# Altium PCB Dual_Holding_Dongle_1)_sided.PcbDoc
Units mil, origin at the board's own origin, x right, y up, seen from the top; angles counter-clockwise.
Board outline 826.77 x 1181.1 mil, 2 copper layers (Top Layer, Bottom Layer); 47 components, 36 nets, 193 pads, 1 vias.
Unrouted connection lines stored in the file: 92.
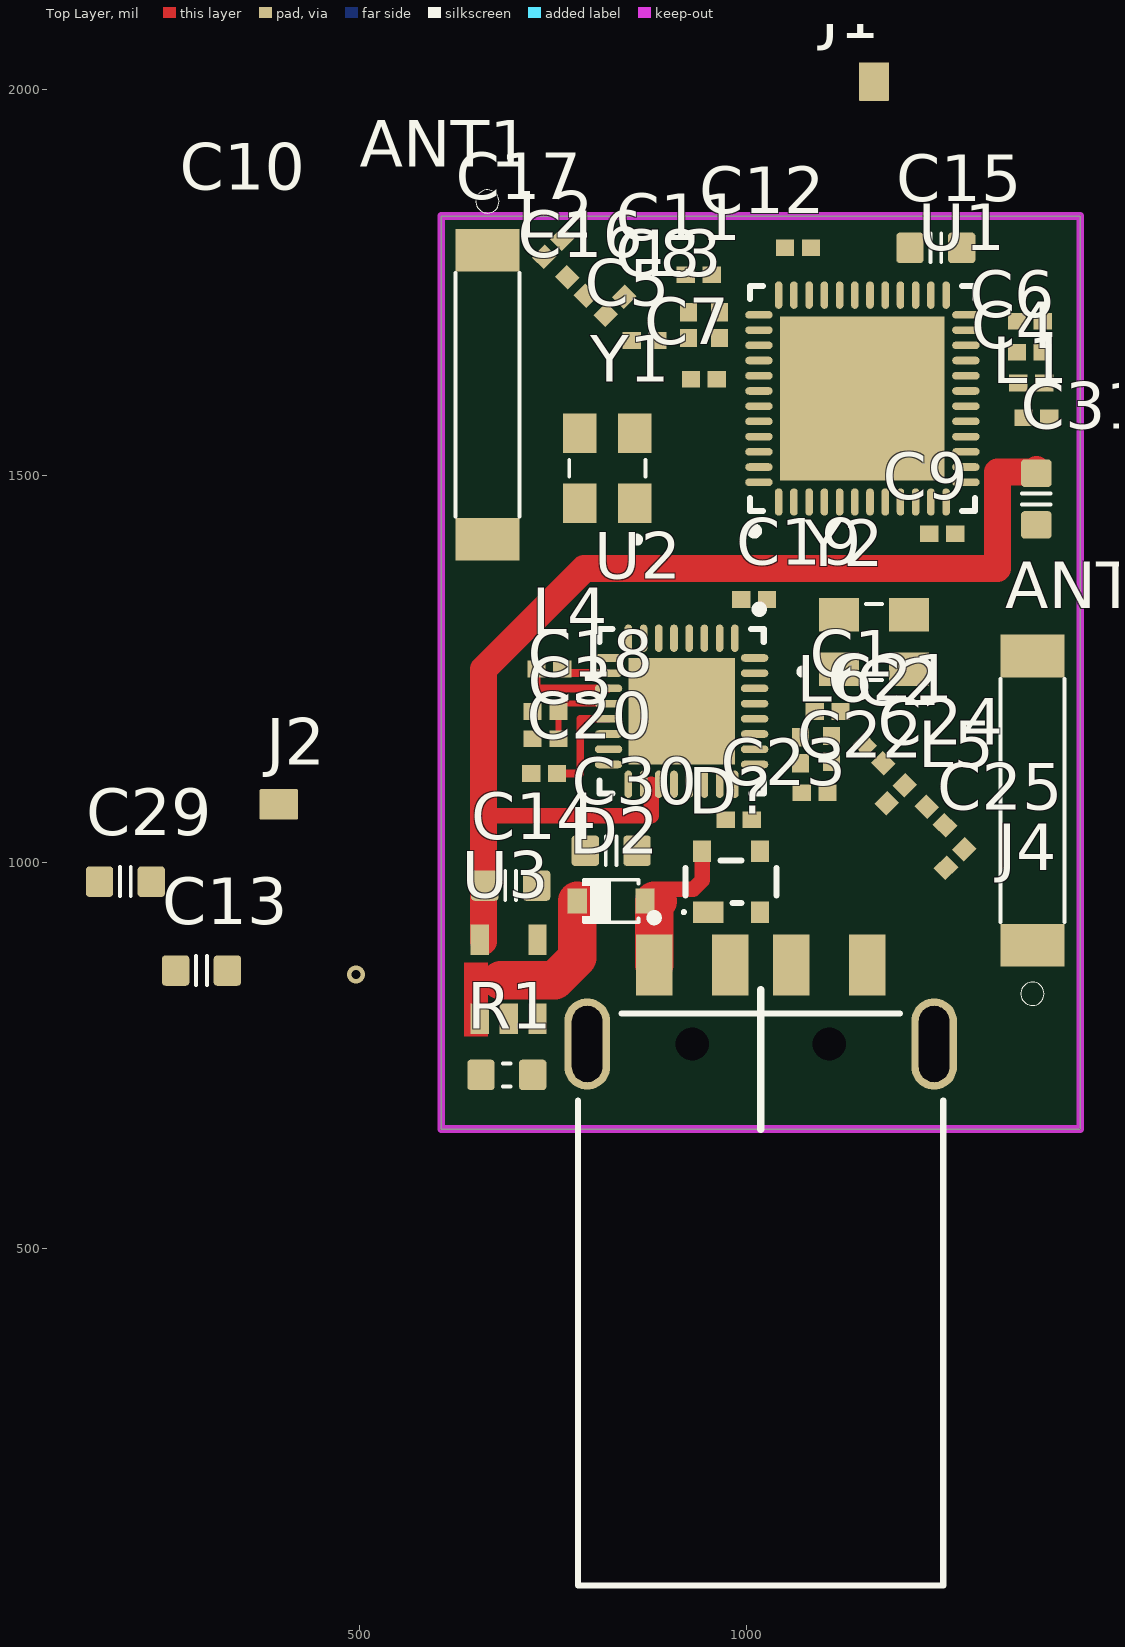
[diagram p0: Top Layer view]
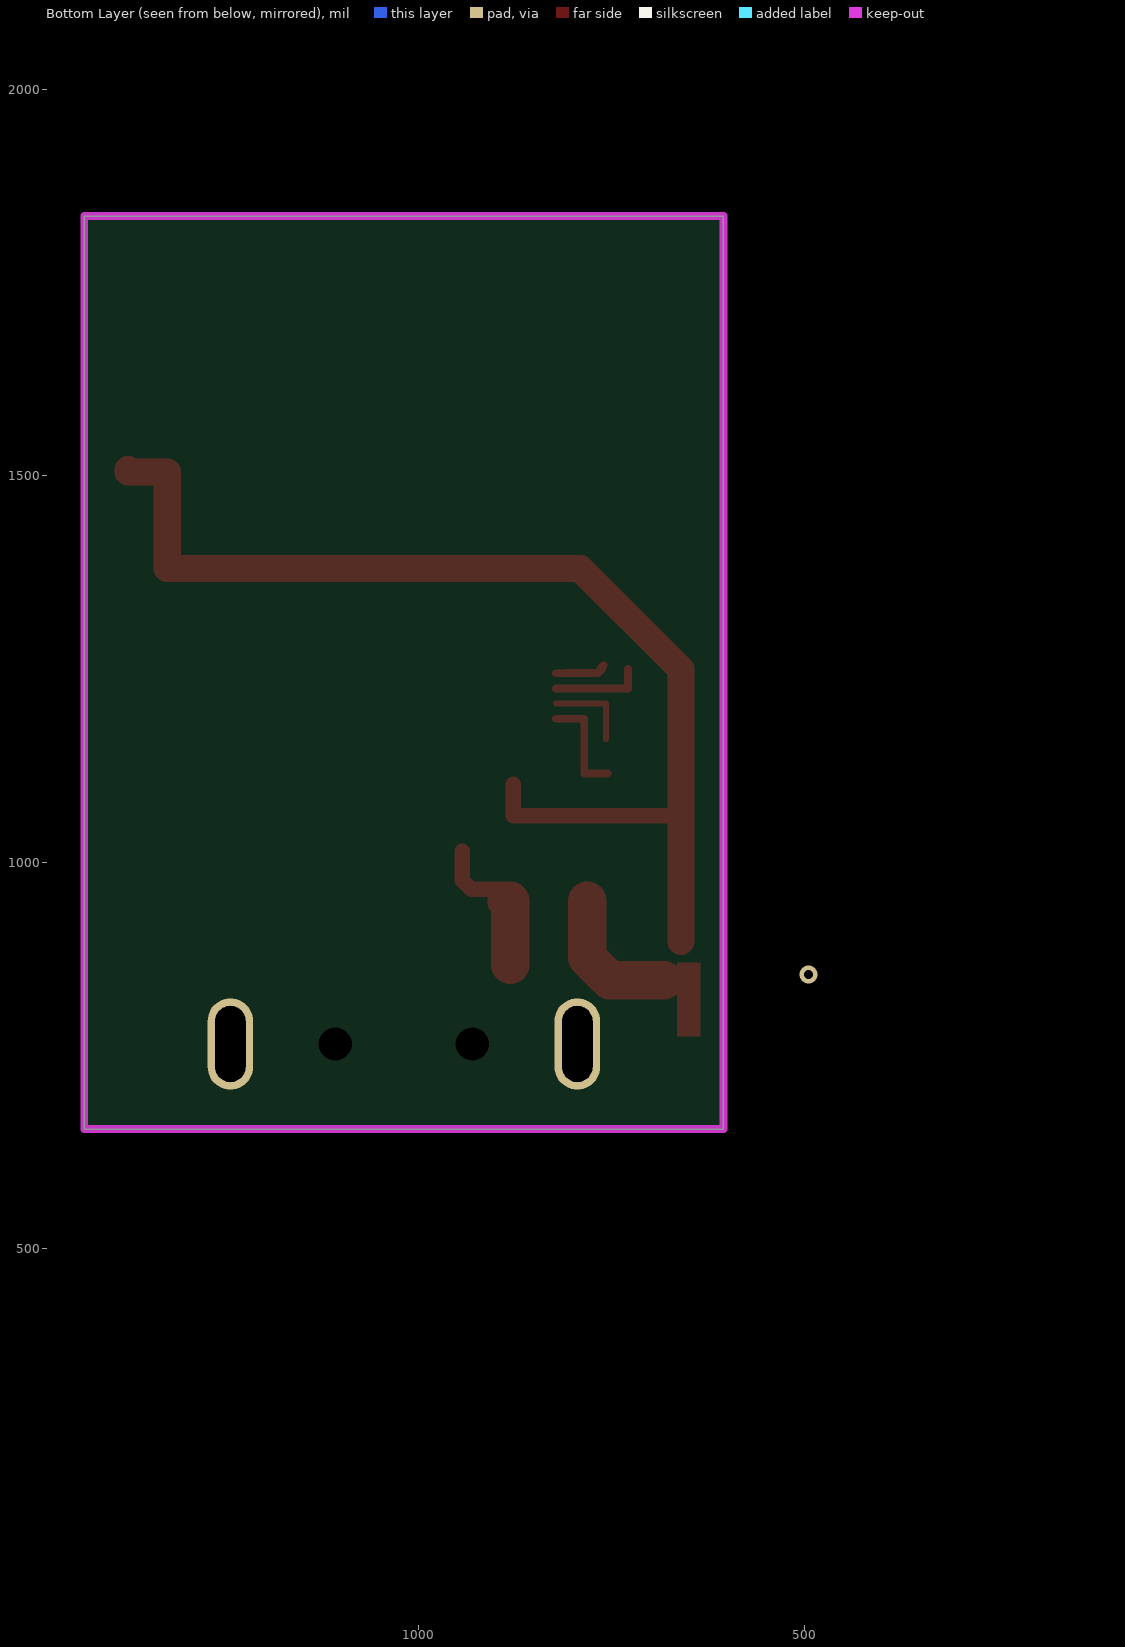
[diagram p1: Bottom Layer view, seen from below]

## Layer stack, top to bottom
Top Solder: solder mask 0.4, Solder Resist, Dk 3.5
Top Layer: signal copper 1.4
Dielectric 1: dielectric 12.6, FR-4, Dk 4.8
Bottom Layer: signal copper 1.4
Bottom Solder: solder mask 0.4, Solder Resist, Dk 3.5

## Board outline
605,655 1431.77,655 1431.77,1836.1 605,1836.1

## Design rules (kind name [scope] priority, off if disabled: settings)
Clearance [All] p1: gap=7 ignorepadtopadclearanceinfootprint=FALSE
PolygonConnect [All] p1: connectstyle=Relief reliefconductorwidth=10 reliefentries=4 polygonreliefangle="90 Angle" airgapwidth=10
RoutingVias [All] p1: holewidth=28 width=50 viastyle="Through Hole" minholewidth=0 minwidth=1 maxholewidth=28 maxwidth=100
SolderMaskExpansion [All] p1: expansion=4 istentingtop=FALSE
Width [All] p1: maxlimit=1000 minlimit=7 preferedwidth=10 minimp=50.000000 maximp=50.000000 favimp=50.000000
30 further rules are at their usual default settings.

## Classes and differential pairs
net class RF: NetANT1_1 NetANT2_1 NetC2_1 NetC2_2 NetC5_1 NetC5_2

## Components (designator, comment, footprint, x,y, rotation, side; value= is the part's Value field where it differs from the comment)
ANT1 "ANT_Rainsun" ANT2-SMD-9.5X2.1X1.0MM 665,1605 r270 top
ANT2 "ANT_Rainsun" ANT2-SMD-9.5X2.1X1.0MM 1370,1080 r90 top
C1 "2.2uF" CAP0402 1105,1195 r0 top
C2 "220pF" CAP0402 1165,1140 r315 top
C3 "104" CAP0402 740,1160 r180 top
C4 "2.2uF" CAP0402 1368.46,1620 r0 top
C5 "220pF" CAP0402 868.27,1675 r180 top
C6 "104" CAP0402 1366.73,1660 r0 top
C7 "2.2uF" CAP0402 945,1625 r180 top
C8 "2.7pF" CAP0402 925,1695 r90 top
C9 "1UF" CAP0402 1253.27,1425 r0 top
C10 "1UF" CAP0402 1366.73,1700 r0 top
C11 "18pF" CAP0402 938.27,1760 r0 top
C12 "1UF" CAP0402 1066.73,1795 r0 top
C13 "1UF" CAPC1608X90N 295,860 r0 top
C14 "1UF" CAPC1608X90N 695,970 r0 top
C15 "1UF" CAPC1608X90N 1245,1795 r0 top
C16 "2pF" CAP0402 830,1720 r45 top
C17 "2pF" CAP0402 750,1795 r45 top
C18 "2.2uF" CAP0402 740,1195 r180 top
C19 "1UF" CAP0402 1010,1340 r0 top
C20 "1UF" CAP0402 738.27,1115 r180 top
C21 "2.7pF" CAP0402 1110,1146.73 r270 top
C22 "18pF" CAP0402 1088.27,1090 r180 top
C23 "1UF" CAP0402 990,1055 r180 top
C24 "2pF" CAP0402 1193.17,1088.17 r225 top
C25 "2pF" CAP0402 1270,1005 r225 top
C29 "10uF" CAPC1608X90N 196.54,975 r0 top
C30 "10uF" CAPC1608X90N 825,1015 r0 top
C31 "10uF" CAPC1608X90N 1375,1470 r270 top
D2 "1N5819/SS14/S4(SOD_323)" SMT_DIODE_SOD_323 825,950 r180 top
D? "PRTR5V0U2X,215" NXP-SOT143B-4_V 980,975 r90 top
J1 "TEST_POINT" TEST_POINT 1165,2010 r0 top
J2 "TEST_POINT" TEST_POINT 395,1075 r90 top
J4 "480-37-1000" MOLX-480-37-1000_V 1018.39,816.18 r0 top locked
L1 "47uH" IND0402 1375,1575 r0 top value="150 mH"
L2 "3.3nH" IND0402 780,1745 r135 top value="150 mH"
L3 "1.3nF" IND0402 965,1695 r270 top value="150 mH"
L4 "47uH" IND0402 745,1250 r180 top value="150 mH"
L5 "3.3nH" IND0402 1245,1060 r135 top value="150 mH"
L6 "1.3nF" IND0402 1070,1145 r90 top value="150 mH"
R1 "Resistor" RESC1608N_ZERO 690,725 r0 top value=100K
U1 "Telink TLSR8251F512ET48" QFN50P700X700X80_HS-49N 1150,1600 r90 top
U2 "Telink TLSR8251F512ET32" QFN50P500X500X80_HS-33N2 916.1,1195.51 r270 top
U3 "AP2112K-3.3TRG1" SOT23-5 692.4,797.64 r0 top
Y1 "ECS-240-10-33-AGM-TR" XTAL_ECS-240-10-33-AGM-TR 820,1510 r90 top
Y2 "ECS-240-10-33-AGM-TR" XTAL_ECS-240-10-33-AGM-TR 1165,1285 r0 top

## Footprints (in the part's own frame and the unit in brackets; to place one, negate y for a bottom-side part, rotate by r counter-clockwise, add the part's x,y. Pads: shape width x height; smd on the part's side, far side on the other; paste and mask are expansions set on the pad)
ANT2-SMD-9.5X2.1X1.0MM [mm]
  rect 1.4x2.1 smd: 1(-4.75,0) 2(4.75,0)
  silkscreen extent -6.73,-1.05 4,1.05
CAP0402 [mm] "0402 foorprint SMT"
  rect 0.6x0.55 smd: 1(-0.425,0) 2(0.425,0)
  body extent -0.5,-0.26 0.5,0.26, height 0.57
CAPC1608X90N [mm] "Chip Capacitor, Body 1.6x0.8mm, EIA 0603, IPC Medium Density"
  round 0.254 on Mech15: 0(0,0)
  rrect25% 0.9x1 smd: 1(-0.85,0) 2(0.85,0)
  silkscreen extent -0.18,-0.48 0.18,0.48, body extent -0.85,-0.45 0.85,0.45, height 0.89
IND0402 [mm] "0402 foorprint SMT"
  rect 0.6x0.55 smd: 1(-0.425,0) 2(0.425,0)
  body extent -0.5,-0.25 0.5,0.25, height 0.5
MOLX-480-37-1000_V [mm] "CONN, 4-Leads, Body 12x18.8mm"
  rect 1.2x2 smd: 1(-3.5,1.3) 2(-1,1.3) 3(1,1.3) 4(3.5,1.3)
  oval 1.5x3 hole 1 slot 2.5 at 90 deg: 5(-5.7,-1.3) 6(5.7,-1.3)
  round 0.5 hole 1.1 unplated: MH1(-2.25,-1.3) MH2(2.25,-1.3)
  silkscreen extent -6,-19.1 6,2.97, body extent -6.35,-19.08 6.35,2.2, height 3.07
NXP-SOT143B-4_V [mm] "SOT143, 4-Leads, Body 3x1.4mm"
  rect 0.7x1 smd: 1(-1,0.75)
  rect 0.7x0.6 smd: 2(-1,-0.95) 3(1,-0.95) 4(1,0.95)
  silkscreen extent -1.05,-1.5 0.7,1.6, body extent -0.7,-1.5 0.7,1.5, height 1.1
QFN50P500X500X80_HS-33N2 [mm] "QFN, 32-Leads, Body 5.00x5.00mm, Pitch 0.50mm, Thermal Pad 3.50x3.50mm, IPC Medium Density"
  oval 0.9x0.25 smd: 1(-2.4,1.75) 2(-2.4,1.25) 3(-2.4,0.75) 4(-2.4,0.25) 5(-2.4,-0.25) 6(-2.4,-0.75) 7(-2.4,-1.25) 8(-2.4,-1.75) 17(2.4,-1.75) 18(2.4,-1.25) 19(2.4,-0.75) 20(2.4,-0.25) 21(2.4,0.25) 22(2.4,0.75) 23(2.4,1.25) 24(2.4,1.75)
  oval 0.25x0.9 smd: 9(-1.75,-2.4) 10(-1.25,-2.4) 11(-0.75,-2.4) 12(-0.25,-2.4) 13(0.25,-2.4) 14(0.75,-2.4) 15(1.25,-2.4) 16(1.75,-2.4) 25(1.75,2.4) 26(1.25,2.4) 27(0.75,2.4) 28(0.25,2.4) 29(-0.25,2.4) 30(-0.75,2.4) 31(-1.25,2.4) 32(-1.75,2.4)
  rect 3.5x3.5 smd: 33(0,0)
  silkscreen extent -3.47,-2.7 2.7,2.7, body extent -2.55,-2.55 2.55,2.55, height 0.8
QFN50P700X700X80_HS-49N [mm] "QFN, 48-Leads, Body 7.00x7.00mm, Pitch 0.50mm, Thermal Pad 5.40x5.40mm, IPC Medium Density"
  oval 0.9x0.25 smd: 1(-3.4,2.75) 2(-3.4,2.25) 3(-3.4,1.75) 4(-3.4,1.25) 5(-3.4,0.75) 6(-3.4,0.25) 7(-3.4,-0.25) 8(-3.4,-0.75) 9(-3.4,-1.25) 10(-3.4,-1.75) 11(-3.4,-2.25) 12(-3.4,-2.75) 25(3.4,-2.75) 26(3.4,-2.25) 27(3.4,-1.75) 28(3.4,-1.25) 29(3.4,-0.75) 30(3.4,-0.25) 31(3.4,0.25) 32(3.4,0.75) 33(3.4,1.25) 34(3.4,1.75) 35(3.4,2.25) 36(3.4,2.75)
  oval 0.25x0.9 smd: 13(-2.75,-3.4) 14(-2.25,-3.4) 15(-1.75,-3.4) 16(-1.25,-3.4) 17(-0.75,-3.4) 18(-0.25,-3.4) 19(0.25,-3.4) 20(0.75,-3.4) 21(1.25,-3.4) 22(1.75,-3.4) 23(2.25,-3.4) 24(2.75,-3.4) 37(2.75,3.4) 38(2.25,3.4) 39(1.75,3.4) 40(1.25,3.4) 41(0.75,3.4) 42(0.25,3.4) 43(-0.25,3.4) 44(-0.75,3.4) 45(-1.25,3.4) 46(-1.75,3.4) 47(-2.25,3.4) 48(-2.75,3.4)
  rect 5.4x5.4 smd: 49(0,0)
  silkscreen extent -4.47,-3.7 3.7,3.7, body extent -3.55,-3.55 3.55,3.55, height 0.8
RESC1608N_ZERO [mm] "Chip Resistor, Body 1.6x0.8mm, 0603, IPC Medium Density"
  round 0.254 on Mech15: 0(0,0)
  rrect25% 0.9x1 smd: 1(-0.85,0) 2(0.85,0)
  silkscreen extent -0.13,-0.38 0.13,0.38, body extent -0.85,-0.45 0.85,0.45, height 0.89
SMT_DIODE_SOD_323 [mm]
  rect 0.63x0.83 smd: 1(-1.115,0) 2(1.115,0)
  silkscreen extent -0.9,-0.7 0.96,0.7, body extent -1.35,-0.62 1.35,0.62, height 1.1
SOT23-5 [mm] "SOT143-4 as used in SP0503BAHTG"
  round 0.2 on Top Overlay: 1(-1.7,0.8)
  rect 0.6x1 smd: 1(-0.95,0) 2(0,0) 3(0.95,0) 4(0.95,2.6) 5(-0.95,2.6)
  body extent -1.46,0.13 1.46,2.47, height 1
TEST_POINT [mm]
  rrect10% 1x1.27 smd mask+0.025: 1(0,0)
XTAL_ECS-240-10-33-AGM-TR [mm]
  rect 1.3x1.1 smd: 1(-1.15,-0.9) 2(1.15,-0.9) 3(1.15,0.9) 4(-1.15,0.9)
  silkscreen extent -2.45,-1.25 0.27,1.25

## Part data
ANT1 ANT2: "318010004", Package="FakePackage u", Availability="No availability data", Check_prices=https://www.snapeda.com/parts/AN9520/RainSun/view-part/106325/?ref=eda, MF=RainSun, MP=AN9520, Price=None, SnapEDA_Link=https://www.snapeda.com/parts/AN9520/RainSun/view-part/106325/?ref=snap
C1 C2 C3 C4 C5 C6 C7 C8 C9 C10 C11 C12 C13 C14 C15 C16 C17 C18 C19 C20 C21 C22 C23 C24 C25 C29 C30 C31: library part "CAP C_0603", "Capacitor SMD Cer 470nF 10% 16V X7R 0603", Manufacturer 1="Murata Electronics North America", Manufacturer 2="TDK Corporation", Manufacturer 3="Taiyo Yuden", Manufacturer 4=Samsung, Manufacturer Part Number 1=GRM188R71C474KA88D, Manufacturer Part Number 2=C1608X7R1C474K, Manufacturer Part Number 3=EMK107B7474KA-T, Manufacturer Part Number 4=CL10B474KONE, Package / Case="0603 (1608 metric)", Ratings="16V; X7R", Supplier Part Number 1=490-3295-2-ND, Tolerance=±10%, ComponentLink1Description=http://psearch.murata.com/capacitor/product/GRM188R71C474KA88#.pdf, ComponentLink1URL=http://psearch.murata.com/capacitor/product/GRM188R71C474KA88#.pdf, ComponentLink2Description=http://product.tdk.com/capacitor/mlcc/en/documents/mlcc_commercial_general_en.pdf, ComponentLink2URL=http://product.tdk.com/capacitor/mlcc/en/documents/mlcc_commercial_general_en.pdf, ComponentLink3Description=http://www.yuden.co.jp/or/product/category/capacitor/EMK107B7474KA-T.pdf, ComponentLink3URL=http://www.yuden.co.jp/or/product/category/capacitor/EMK107B7474KA-T.pdf, Material=ceramic, SCDType=spec, Supplier 1=Digi-Key, Supplier 2=Digi-Key, Supplier 3=Digi-Key, Supplier Part Number 2=445-5192-2-ND, Supplier Part Number 3=587-1250-2-ND
D2: library part SMT_DIODE_SCHOTTKY_SOD_323, "Surface mount schottky diode SOD-323(0805) Package"
D?: library part CMP-2000-05285-1, "Ultra Low Capacitance Double Rail-to-Rail ESD Protection Diode, 5.5 V, 1 pF, -40 to 85 degC, 4-Pin SOT143B, RoHS, Tape and Reel", Capacitance Value=16pF, ESD Protection Voltage=8KV@ContactDisc, Leakage Current=0.1uA, Manufacturer="NXP Semiconductors", Operating Temp Range=-40Cto85C, Operating Temperature Classification=Industrial, Operating Temperature Max Deg. C=85C, Operating Temperature Min Deg. C=-40C, Package / Case=SOT, Reverse Breakdown Voltage=6V, Reverse Stand-off Voltage=5.5V, Configuration=Quad, Datasheet URL=https://datasheet.ciiva.com/4479/prtr5v0u2x-102853-4479461.pdf, Datasheet Version="Rev. 02, 01/2008", Direction Type=Uni-Directional, Leakage Current (Max)=0.1uA, Manufacturer URL=http://www.nxp.com/, Mounting=SurfaceMount, Mounting Style=SurfaceMount, Number of Elements=1, Package Type=SOT, Packaging=TapeandReel, Pin Count=3+Tab, Polarity=Uni-Directional, Product Depth (mm)=1.4mm, Product Height (mm)=1mm, Product Length (mm)=3mm, Rad Hardened=No, Suppressor Type=DiodeArrays, Working Voltage=5.5V, Working Voltage (Max)=5.5V
J4: library part CMP-1676-00005-1, "Universal Serial Bus (USB) Shielded I/O Plug, Type A, Right Angle Connector, 1.5 A, -20 to 85 degC, 4-Pin SMD, RoHS, Tray", Case Code (Imperial)=0603, Case Code (Metric)=1608, Max Operating Temperature="155 degC", Min Operating Temperature="-55 degC", Package Quantity=5000, Power Rating="100 mW", Resistance="1 mohm", Tolerance=1%, Voltage Rating="50 V", Case\Package=0603, ComponentLink1Description="Manufacturer URL", ComponentLink1URL=http://www.molex.com/, ComponentLink2Description=Datasheet, ComponentLink2URL=http://www.molex.com/pdm_docs/sd/480371000_sd.pdf, DatasheetVersion="Rev. D, 06/2004", Height="0.45 mm", Length="1.6 mm", Mount="Surface Mount", PackageDescription="4-Pin Surface Mount Device, Body 12 x 18.8 mm", PackageReference=480-37-1000, Packaging="Tape and Reel", Pins=2, REACH SVHC="No SVHC", RoHSCompliant=true, Voltage Rating (DC)="50 V", Width="0.8 mm"
L1 L2 L3 L4 L5 L6: library part Inductor, "Inductor"
R1: library part RES-SM-0603-10K, "RES SM 0603 10K", Supplier Part Number 1=9330399, Supplier 1=Farnell, Supplier 2=Digi-Key, Supplier Part Number 2=541-10.0KHCT-ND
U3: "Linear Voltage Regulator IC 1 Output 600mA SOT-25", Package="SOT-753 Diodes Inc.", Digi-Key_Part_Number=AP2112K-3.3TRG1DICT-ND, Digi-Key_Purchase_URL=https://www.digikey.com.au/product-detail/en/diodes-incorporated/AP2112K-3.3TRG1/AP2112K-3.3TRG1DICT-ND/4505257?utm_source=snapeda&utm_medium=aggregator&utm_campaign=symbol, MF="Diodes Inc.", MP=AP2112K-3.3TRG1, SnapEDA_Link=https://www.snapeda.com/parts/AP2112K-3.3TRG1/Diodes%20Inc./view-part/454988/?ref=snap
Y1 Y2: Package=None, Availability=Unavailable, MP=ECS-240-10-33-AGM-TR, Price=None

## Via types
v1: diameter 23.62, hole 11.81, Top Layer to Bottom Layer, tented both sides, 1 vias

## Nets (pads, with @x,y where several pads share a name; then routed paths per layer and width w, separated by ;. In a path a pad name is that pad's centre, name@x,y a point inside that pad or via, vN(x,y) a via of type N, cw(c..) or ccw(c..) an arc to the next point about the centre after c; other vN are vias at no path point)
1.2V: C4.1 C6.1 C7.1 U1.18 U1.39
1.2V_B: C1.1 C3.1 C18.1 U2.12 U2.28 | length 110.2
  Top Layer w8: C3.1 C18.1 756.73,1205.35 U2.12
  other v1: 495,855
3.3V: C13.1 C14.1 C15.1 C29.1 C31.1 U1.15 U1.26 U1.27 U2.9 U2.18 U2.19 U3.5 | length 1507.6
  Top Layer w20: 660,1060 876.73,1060 876.73,1101.02
  Top Layer w35: U3.5@660,897.5 660,1060 660,1250 790,1380 1324.5,1380 1324.5,1505 1375,1505 C31.1@1375,1508.46
D_N: D?.3 J4.2
D_P: D?.2 J4.3
GND: C1.2 C3.2 C4.2 C6.2 C7.2 C8.2 C9.2 C10.2 C11.1 C12.2 C13.2 C14.2 C15.2 C16.2 C17.2 C18.2 C19.2 C20.2 C21.2 C22.1 C23.2 C24.2 C25.2 C29.2 C30.2 C31.2 D?.1 J4.4 J4.5 J4.6 U1.12 U1.14 U1.49 U2.7 U2.33 U3.2 Y1.2 Y1.4 Y2.2 Y2.4
NetANT1_1: ANT1.1 C17.1 L2.2
NetANT2_1: ANT2.1 C25.1 L5.2
NetC2_1: C2.1 C21.1 L6.2 U2.27
NetC2_2: C2.2 C24.1 L5.1
NetC5_1: C5.1 C8.1 L3.2 U1.38
NetC5_2: C5.2 C16.1 L2.1
NetC9_1: C9.1 U1.13
NetC10_1: C10.1 U1.19
NetC11_2: C11.2 L3.1 U1.37
NetC19_1: C19.1 U2.8
NetC20_1: C20.1 U2.13 | length 137.3
  Top Layer w10: C20.1 785,1115 785,1185.67 U2.13
NetC22_2: C22.2 L6.1 U2.26
NetC30_1: C30.1 D2.2 R1.1 U3.1@655,797.64 | length 184.4
  Top Layer w50: 682.18,847.32 685,847.32 751.81,847.32 781.1,876.61 D2.2
NetJ1_1: J1.1 U1.9
NetJ2_1: J2.1 U2.5
NetL1_1: L1.1 U1.16
NetL1_2: L1.2 U1.17
NetL4_1: L4.1 U2.10 | length 66.8
  Top Layer w10: L4.1@760,1255 L4.1@763.37,1251.63 ; L4.1 766.73,1245 808.28,1245 808.56,1244.72 U2.10
NetL4_2: L4.2 U2.11 | length 118.3
  Top Layer w10: L4.2 728.27,1225 U2.11
NetR1_2: R1.2 U3.3
RST_A: C12.1 C23.1 U1.36 U2.25
RXD: U1.4 U2.2
TXD: U1.1 U2.3
USB_D_N: U1.7
USB_D_P: U1.8
VBUS: D2.1 D?.4 J4.1 | length 187.2
  Top Layer w20: 885,965 930.88,965 942.6,976.72 D?.4
  Top Layer w50: J4.1 880.59,950 885,950
XC1_A: U1.40 Y1.3
XC1_B: U2.29 Y2.3
XC2_A: U1.41 Y1.1
XC2_B: U2.30 Y2.1
pads on no net: ANT1.2 ANT2.2 C13.0 C14.0 C15.0 C29.0 C30.0 C31.0 J4.MH1 J4.MH2 R1.0 U1.2 U1.3 U1.5 U1.6 U1.10 U1.11 U1.20 U1.21 U1.22 U1.23 U1.24 U1.25 U1.28 U1.29 U1.30 U1.31 U1.32 U1.33 U1.34 U1.35 U1.42 U1.43 U1.44 U1.45 U1.46 U1.47 U1.48 U2.1 U2.4 U2.6 U2.14 U2.15 U2.16 U2.17 U2.20 U2.21 U2.22 U2.23 U2.24 U2.31 U2.32 U3.1@625.47,829.13 U3.4

## Keep-outs
Keep-Out Layer:
  the board outline again, w10

## Other copper
Top Layer:
  region net NetC30_1: 665,870 665,775 635,775 635,870

## Silkscreen, mask and mechanical layers (free items; w line width, h text height)
Top Overlay:
  lines w10: 1018.39,655 1018.39,835

## Text inside footprints (layer, text, board x,y; h text height)
J4: Mechanical 1 "PCB EDGE" at 1068.39,665 h19.68